# Altium PCB VISUR-botI_a.PcbDoc
Units mm, origin at the board's own origin, x right, y up, seen from the top; angles counter-clockwise.
Board outline 44.5 x 44.5 mm, 2 copper layers (Top Layer, Bottom Layer), stack 1.486 mm thick; 6 components, 12 nets, 46 pads, 0 vias.
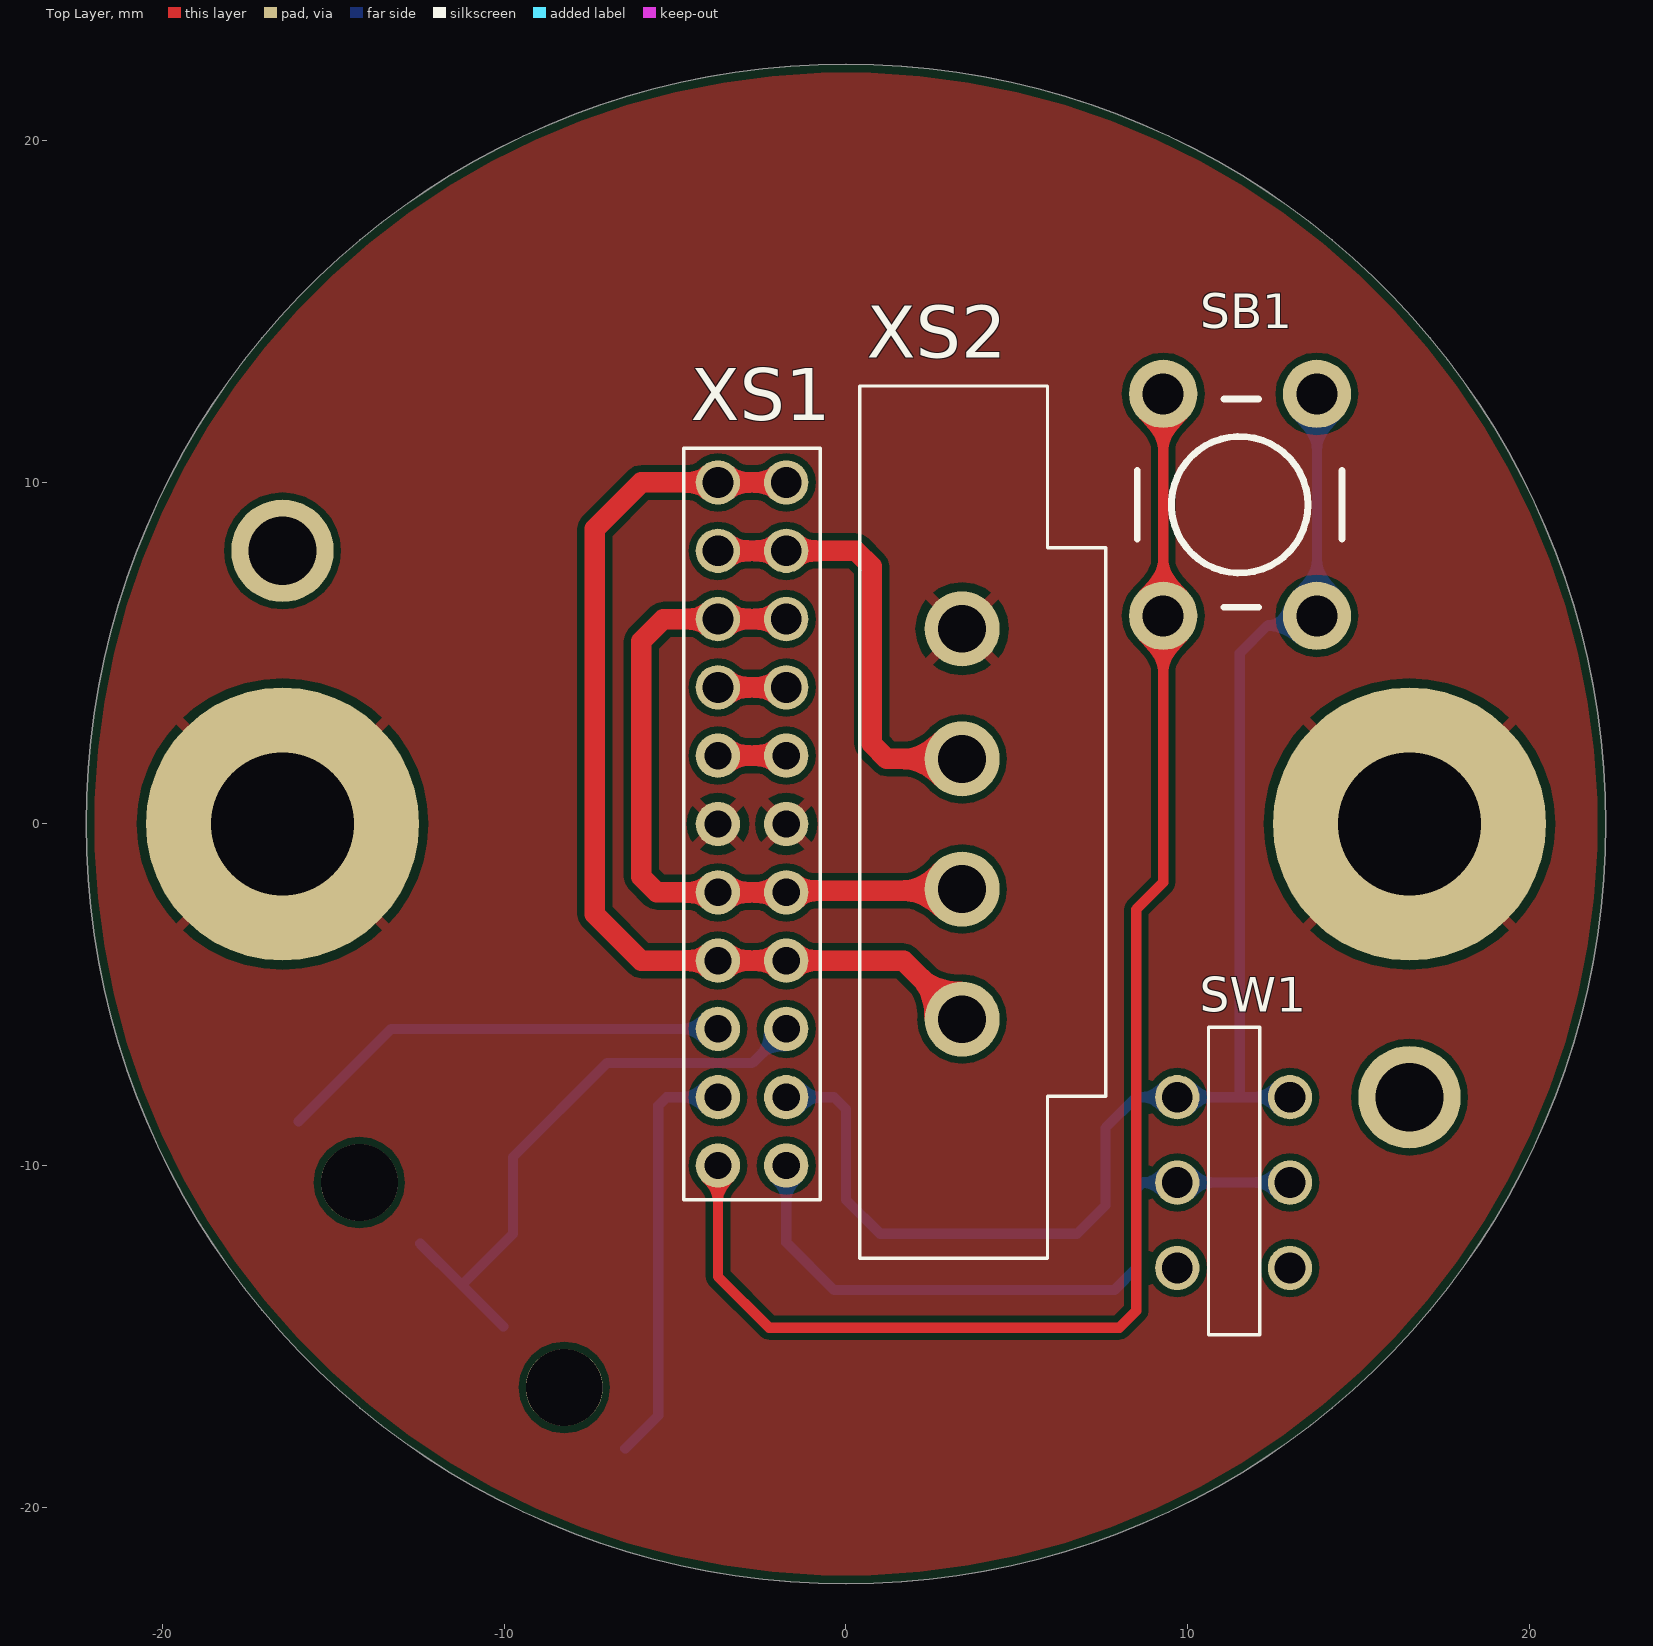
[diagram p0: Top Layer view]
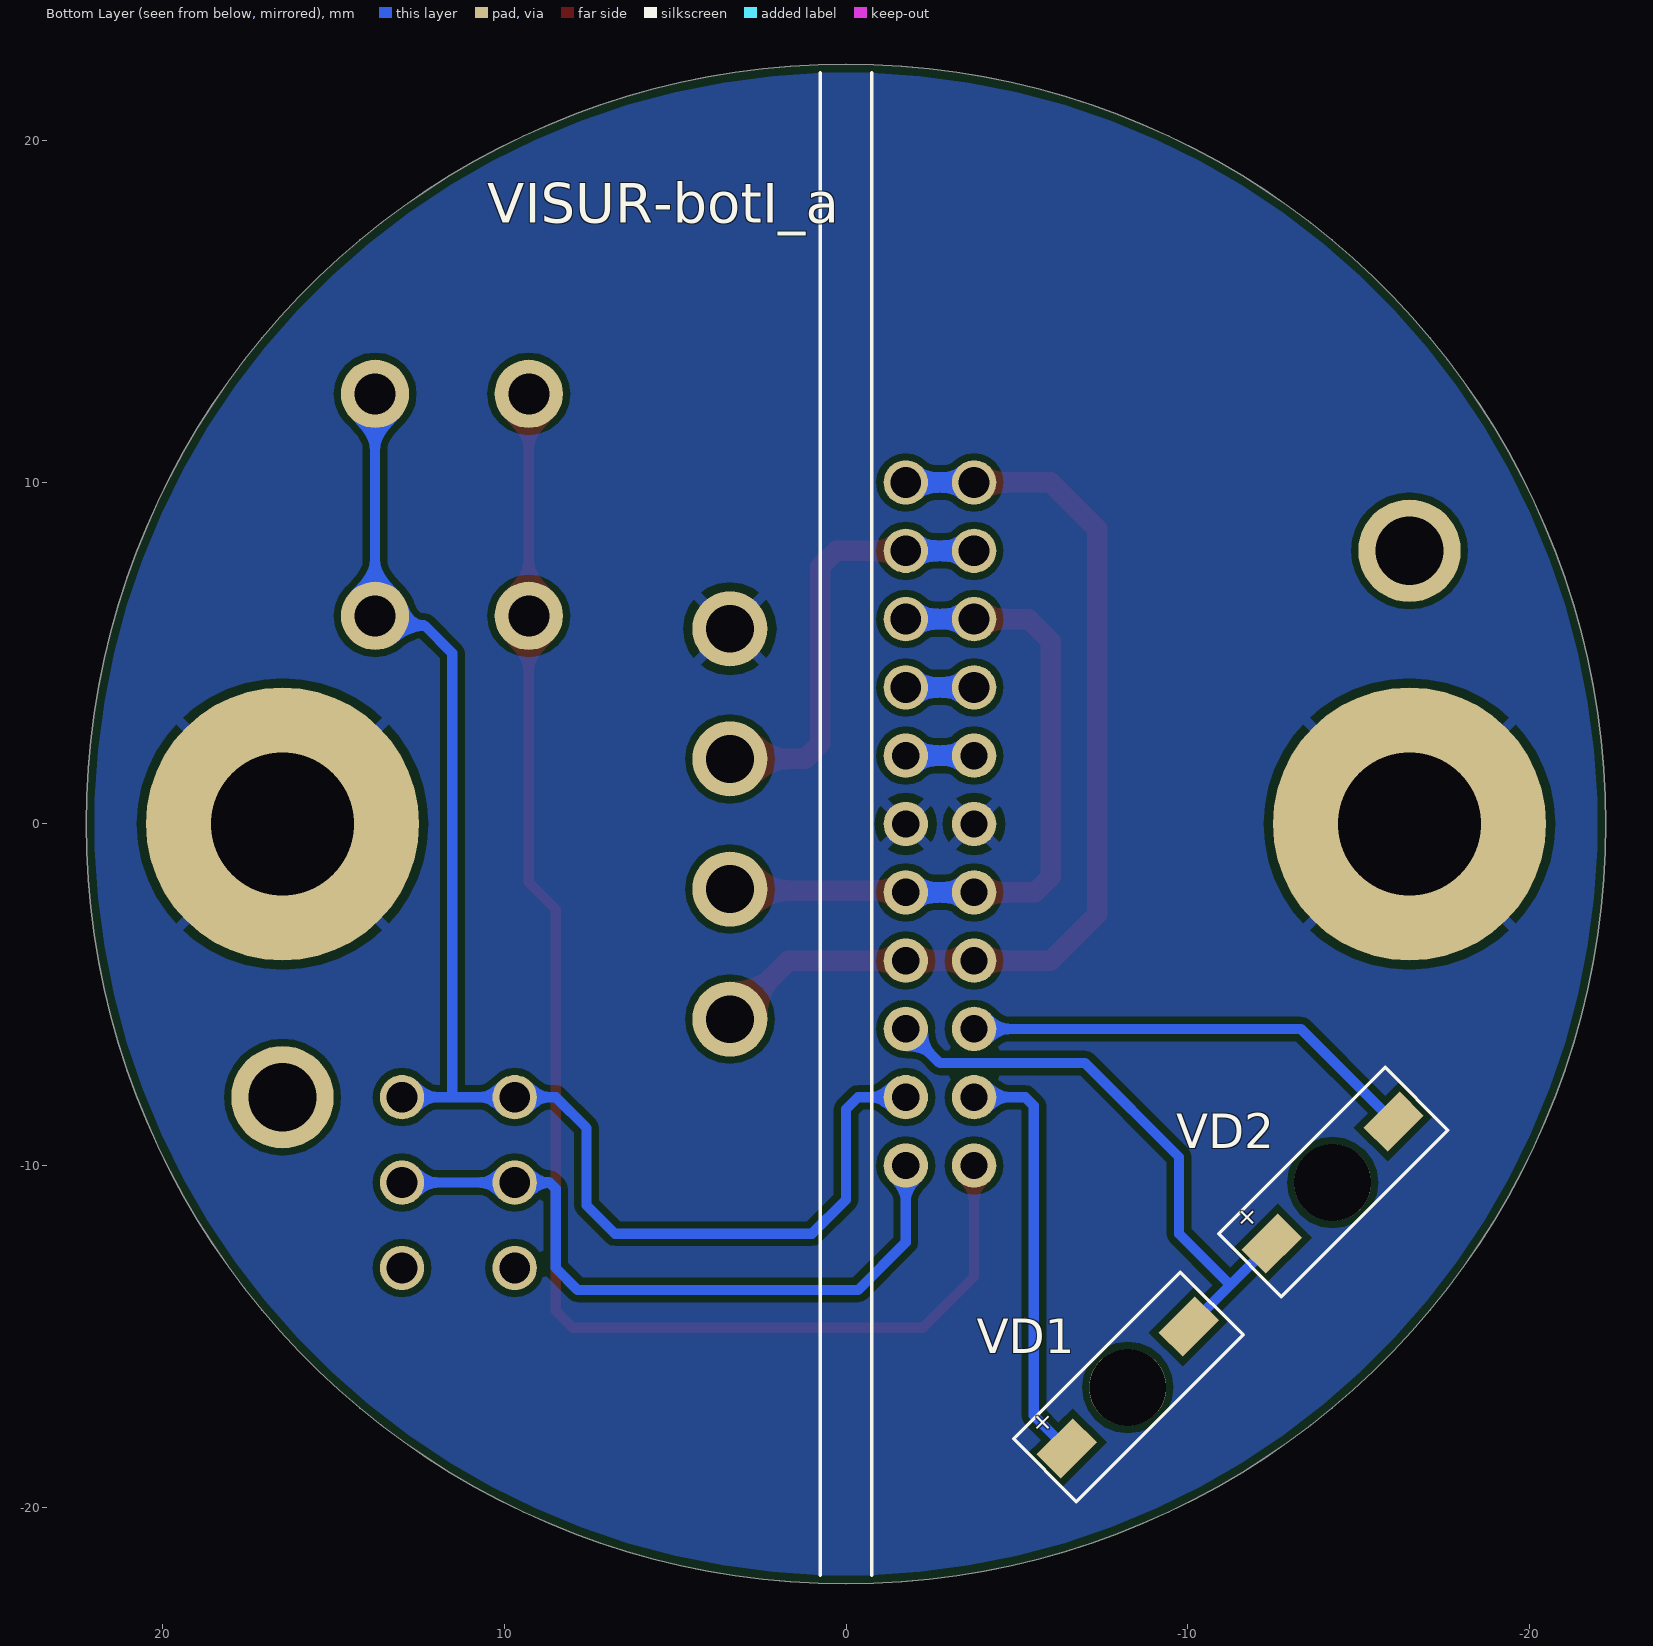
[diagram p1: Bottom Layer view, seen from below]
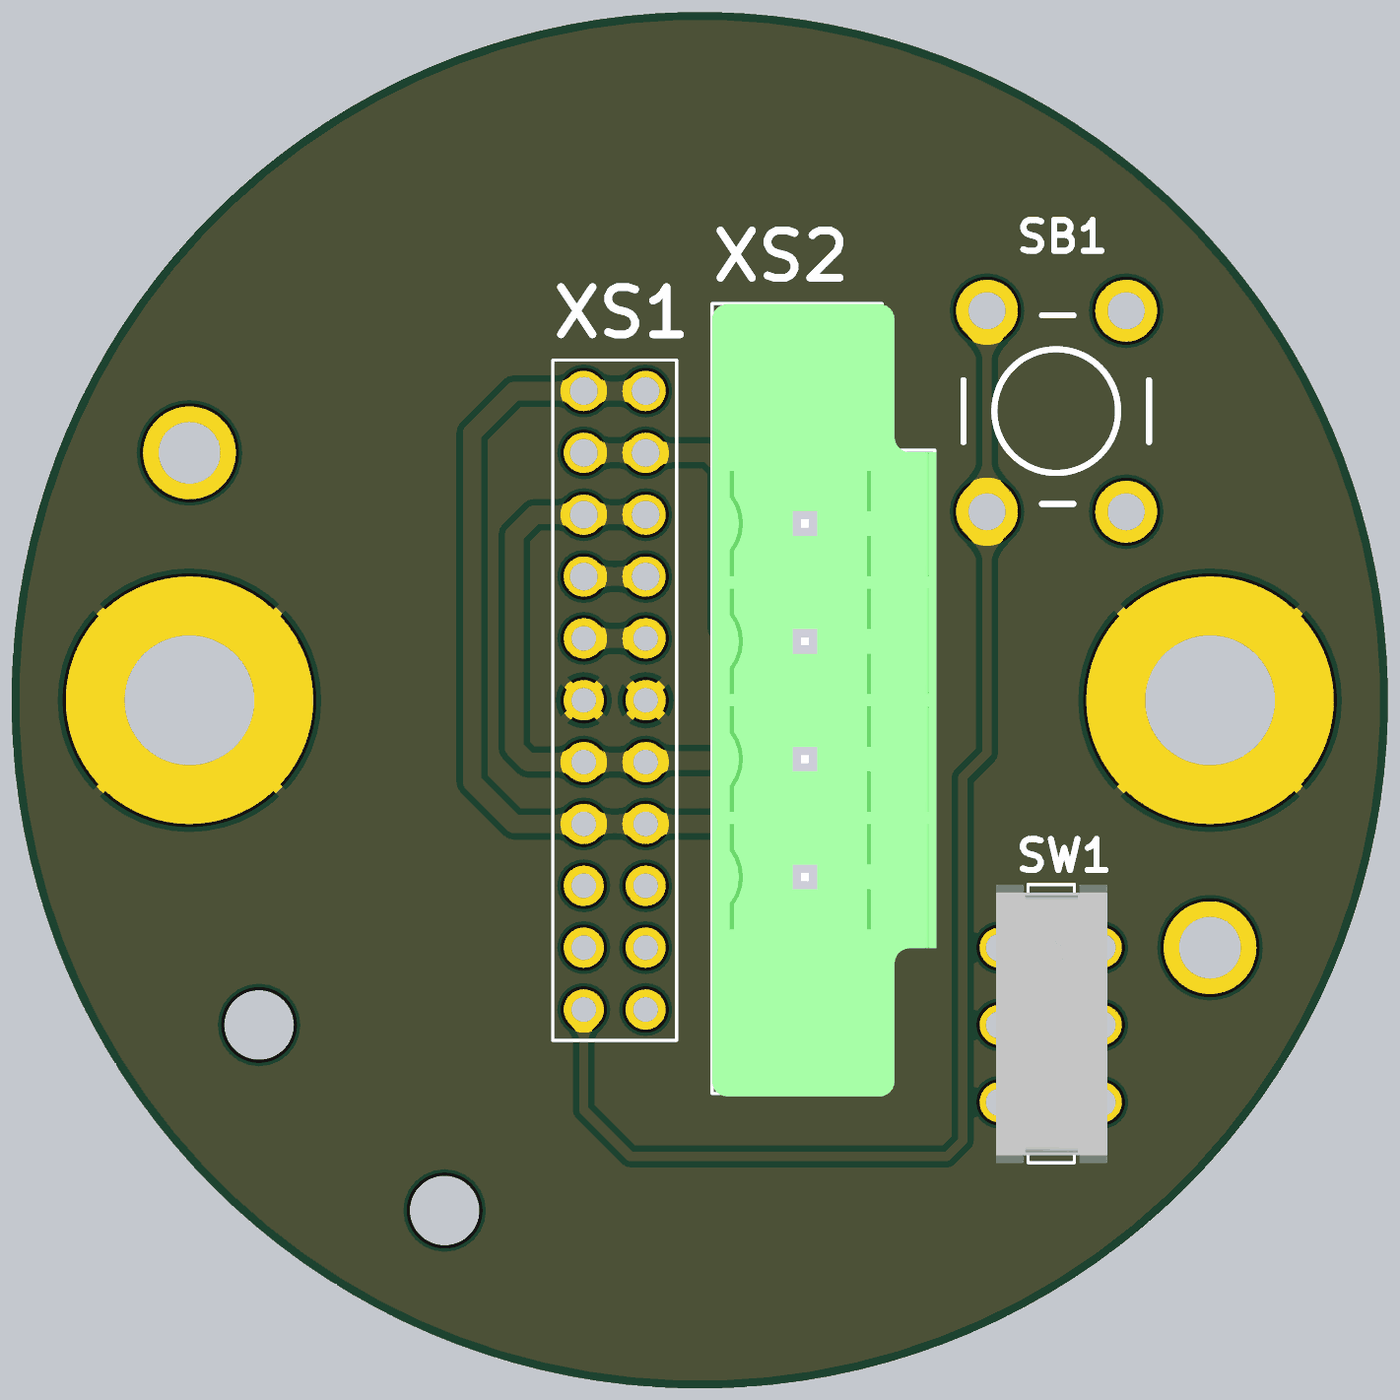
[diagram p2: 3D render of the assembled board from above, using the file's embedded part models]

## Layer stack, top to bottom
Top Solder: solder mask 0.0102, Solder Resist, Dk 3.5
Top Layer: signal copper 0.018
Dielectric 2: prepreg 0.125, PP-006, Dk 4.1
Dielectric 1: dielectric 1.2, FR-4, Dk 4.8
Dielectric 3: prepreg 0.125, PP-006, Dk 4.1
Bottom Layer: signal copper 0.018
Bottom Solder: solder mask 0.0102, Solder Resist, Dk 3.5

## Board outline
-22.25,0 ccw(c0,0) 0,-22.25 ccw(c0,0) 22.25,0 ccw(c0,0) 0,22.25 ccw(c0,0)

## Design rules (kind name [scope] priority, off if disabled: settings)
BoardOutlineClearance [All] p1: gap=0.254 ignorepadtopadclearanceinfootprint=FALSE except(0: Arc-SplitContinuation Track-SplitContinuation SMDPad-SplitContinuation THPad-SplitContinuation Via-SplitContinuation Fill-SplitContinuation Poly-SplitContinuation Region-SplitContinuation Text-SplitContinuation)
Clearance [All] p1: gap=0.2 ignorepadtopadclearanceinfootprint=FALSE except(0: Arc-Hole Track-Hole SMDPad-Hole THPad-Hole Via-Hole Fill-Hole Poly-Hole Region-Hole Text-Hole)
HoleSize [All] p1: absolutevalues=TRUE maxlimit=5 minlimit=0.025 maxpercent=80.000 minpercent=20.000
PolygonConnect [All] p1: connectstyle=Relief reliefconductorwidth=0.3 reliefentries=4 polygonreliefangle="45 Angle" airgapwidth=0.254
RoutingVias [All] p1: holewidth=0.3 width=0.7 viastyle="Through Hole" minholewidth=0.3 minwidth=0.7 maxholewidth=0.711 maxwidth=1.27
ShortCircuit [All] p1: allowed=TRUE
SilkToSilkClearance [All] p1: silktosilkclearance=0.15
SolderMaskExpansion [All] p1: expansion=0.102 istentingtop=FALSE
Width [All] p1: maxlimit=5 minlimit=0.254 preferedwidth=0.254
27 further rules are at their usual default settings.

## Components (designator, comment, footprint, x,y, rotation, side; value= is the part's Value field where it differs from the comment)
SB1 "Tactile button, 6x6mm" "BUT: 6x6" 11.539,9.345 r90 top locked
SW1 "JS202011SCQN" JS202011CQN 13,-13 r90 top
VD1 "KM2520SURCK09" KM2520SURCK09 -6.465,-18.285 r135 bottom
VD2 "KM2520SURCK09" KM2520SURCK09 -12.465,-12.285 r135 bottom
XS1 "PLD2-22-R(Female)" "CON: PLD2-22-R(Female)" -3.75,-10 r90 top locked
XS2 "15EDGVM-3.81-04P" "CON: 15EDGVM-3.81-04P" 3.4,-5.715 r90 top

## Footprints (in the part's own frame and the unit in brackets; to place one, negate y for a bottom-side part, rotate by r counter-clockwise, add the part's x,y. Pads: shape width x height; smd on the part's side, far side on the other; paste and mask are expansions set on the pad)
"BUT: 6x6" [mm] "Leaded Tactile Button 6x6"
  round 2 hole 1.2: 1(-3.25,2.25) 1(3.25,2.25) 2(-3.25,-2.25) 2(3.25,-2.25)
  silkscreen extent -3,-2.99 3.1,3.01, body extent -3.15,-2.96 3.25,3.04, height 4.5
"CON: 15EDGVM-3.81-04P" [mm]
  round 2.2 hole 1.4: 1(0,0) 2(3.81,0) 3(7.62,0) 4(11.43,0)
  silkscreen extent -7,-4.2 18.54,3, body extent -7.1,-4.25 18.53,3, height 9.2
"CON: PLD2-22-R(Female)" [mm]
  round 1.3 hole 0.8: 1(0,-2) 2(0,0) 3(2,-2) 4(2,0) 5(4,-2) 6(4,0) 7(6,-2) 8(6,0) 9(8,-2) 10(8,0) 11(10,-2) 12(10,0) 13(12,-2) 14(12,0)
  round 1.3 hole 0.9: 15(14,-2) 16(14,0) 17(16,-2) 18(16,0) 19(18,-2) 20(18,0) 21(20,-2) 22(20,0)
  silkscreen extent -1,-3 21,1
JS202011CQN [mm]
  round 1.3 hole 0.9: 1(0,0) 2(2.5,0) 3(5,0) 4(5,3.3) 5(2.5,3.3) 6(0,3.3)
  silkscreen extent -1.96,0.88 7.04,2.38, body extent -1.96,-0.17 7.04,3.43, height 5.22
KM2520SURCK09 [mm] "SM LED Body 1.6x0.8mm; 2 Flat Leads"
  round 2.25 hole 2.25 unplated: 0(2.525,0)
  rect 1.5x1 smd: 1(0,0) 2(5.05,0)
  silkscreen extent -0.9,-1.3 6,1.3, body extent 1.1,-0.9 3.5,1, height 1.5

## Part data
SB1: library part Button_tactile, Manufacturer="TE Connectivity", Package=6x6mm, PartNumber=FSM2JSMAATR, CommentText="\"Кнопка\"", ComponentLink1Description=Datasheet(6x6), ComponentLink1URL=https://static.chipdip.ru/lib/551/DOC001551938.pdf, TypeButton="Tactile button", ValueManufacturerPartNumber="Tactile button, 6x6mm"
SW1: "Переключатель", Manufacturer="C&K Component", ReplacementPart1Manufacturer=Китай, ReplacementPart1PartNumber=is-1390, ComponentLink1Description="Data Sheet", ComponentLink1URL=https://ru.mouser.com/datasheet/2/60/js-1841892.pdf, ComponentLink2Description="Replacement 1 DataSheet"
VD1 VD2: "LED"
XS1: library part PLD2-22(Female), ComponentLink1Description=Datasheet, ComponentLink1URL=https://www.compel.ru/item-pdf/1e1366ded138976aeb89dd182fa987b9/ps/kls~kls1-207b.pdf
XS2: ComponentLink1Description=Datasheet, ComponentLink1URL=http://files.xn--e1agecchai.xn--p1ai/pdf/15edgvm-3.81.pdf

## Free pads (board coordinates)
  round 8 hole 4.2: 0(-16.5,0) 0(16.5,0)
  round 3 hole 2: 1(-16.5,8) 1(16.5,-8)

## Nets (pads, with @x,y where several pads share a name; then routed paths per layer and width w, separated by ;. In a path a pad name is that pad's centre, name@x,y a point inside that pad or via, vN(x,y) a via of type N, cw(c..) or ccw(c..) an arc to the next point about the centre after c; other vN are vias at no path point)
NetSB1_1: SB1.1 XS1.2 | length 43.5
  Top Layer w0.3: XS1.2 -3.75,-13.25 -2.25,-14.75 8,-14.75 8.5,-14.25 8.5,-2.5 9.289,-1.711 9.289,6.095 SB1.1@9.289,12.595
NetSB1_2: SB1.2 SW1.3 SW1.4 XS1.3 | length 44.6
  Bottom Layer w0.3: XS1.3 -0.351,-8 0,-8.351 0,-11 1,-12 6.764,-12 7.6,-11.164 7.6,-8.9 8.5,-8 SW1.4 SW1.3 11.526,-8 ; 11.526,-7.96 11.527,-7.958 11.527,5 12.339,5.812 13.506,5.812 13.789,6.095 SB1.2@13.789,12.595
NetSW1_2: SW1.2 SW1.5 XS1.1 | length 20.2
  Bottom Layer w0.3: XS1.1 -1.75,-12.25 -0.351,-13.649 7.851,-13.649 8.5,-13 8.5,-10.676 8.676,-10.5 SW1.5 SW1.2
NetVD1_1: VD1.1 XS1.4 | length 12.3
  Bottom Layer w0.3: VD1.1 -5.5,-17.321 -5.5,-8.25 -5.25,-8 XS1.4
NetVD1_2: VD1.2 VD2.1 XS1.5 | length 17.4
  Bottom Layer w0.3: VD2.1 -11.25,-13.5 ; VD1.2 -11.25,-13.5 ; XS1.5 -2.75,-7 -3.336,-7 -7,-7 -9.75,-9.75 -9.75,-12 -11.25,-13.5
NetVD2_2: VD2.2 XS1.6 | length 13.4
  Bottom Layer w0.3: VD2.2 -13.321,-6 XS1.6
NetXS1_7: XS1.7 XS1.8 XS1.21 XS1.22 XS2.1 | length 31.5
  Top Layer w0.6: XS1.21 XS1.22 -6,10 -7.36,8.64 -7.36,-2.64 -6,-4 XS1.8 XS1.7 1.685,-4 XS2.1
  Bottom Layer w0.6: XS1.22 XS1.21
NetXS1_9: XS1.9 XS1.10 XS1.17 XS1.18 XS2.2 | length 25.4
  Top Layer w0.6: XS1.17 XS1.18 -5.35,6 -6,5.35 -6,-1.54 -5.54,-2 XS1.10 XS1.9 ; XS1.9@-1.66,-2.09 XS1.9 ; XS2.2 3.353,-1.953 -1.702,-1.953 XS1.9
  Bottom Layer w0.6: XS1.10 XS1.9 XS1.9@-1.616,-2.134 ; XS1.18 XS1.17
NetXS1_11: pad.0 XS1.11 XS1.12 XS2.4
NetXS1_13: XS1.13 XS1.14 | length 4
  Top Layer w0.6: XS1.14 XS1.13
  Bottom Layer w0.6: XS1.14 XS1.13
NetXS1_15: XS1.15 XS1.16
NetXS1_19: XS1.19 XS1.20 XS2.3 | length 14.7
  Top Layer w0.6: XS1.20 XS1.19 0.29,8 0.75,7.54 0.75,2.351 1.196,1.905 XS2.3
  Bottom Layer w0.6: XS1.20 XS1.19
pads on no net: SW1.1 SW1.6 VD1.0 VD2.0
copper on no net: | length 4
  Top Layer w0.6: -3.75,4 -1.75,4
  Bottom Layer w0.6: -3.75,4 -1.75,4

## Polygon pours and split planes (outlines as drawn)
NetXS1_11 on Bottom Layer "NONET_L02_P-001" (solid, pour order 0): -23,23 23,23 23,-24 -23,-24
NetXS1_11 on Top Layer "NONET_L02_P-001" (solid, pour order 1): -23.177,23 22.823,23 22.823,-23.458 -23.177,-23.458

## Silkscreen, mask and mechanical layers (free items; w line width, h text height)
Bottom Overlay:
  lines w0.1: -0.75,-22 -0.75,22 ; 0.75,-22 0.75,22
  text "VISUR-botI_a" at 10.498,17.22 h2
Board:
  circle w0.15: c0,0 r22.25

## Text inside footprints (layer, text, board x,y; h text height)
VD1: Bottom Overlay "+" at -5.828,-18.073 h1 r315
VD2: Bottom Overlay "+" at -11.828,-12.073 h1 r315